# Altium PCB ledstripes.PcbDoc
Units mm, origin at the board's own origin, x right, y up, seen from the top; angles counter-clockwise.
Board outline 38.74 x 35.56 mm, 2 copper layers (Top Layer, Bottom Layer), stack 1.671 mm thick; 33 components, 28 nets, 89 pads, 27 vias.
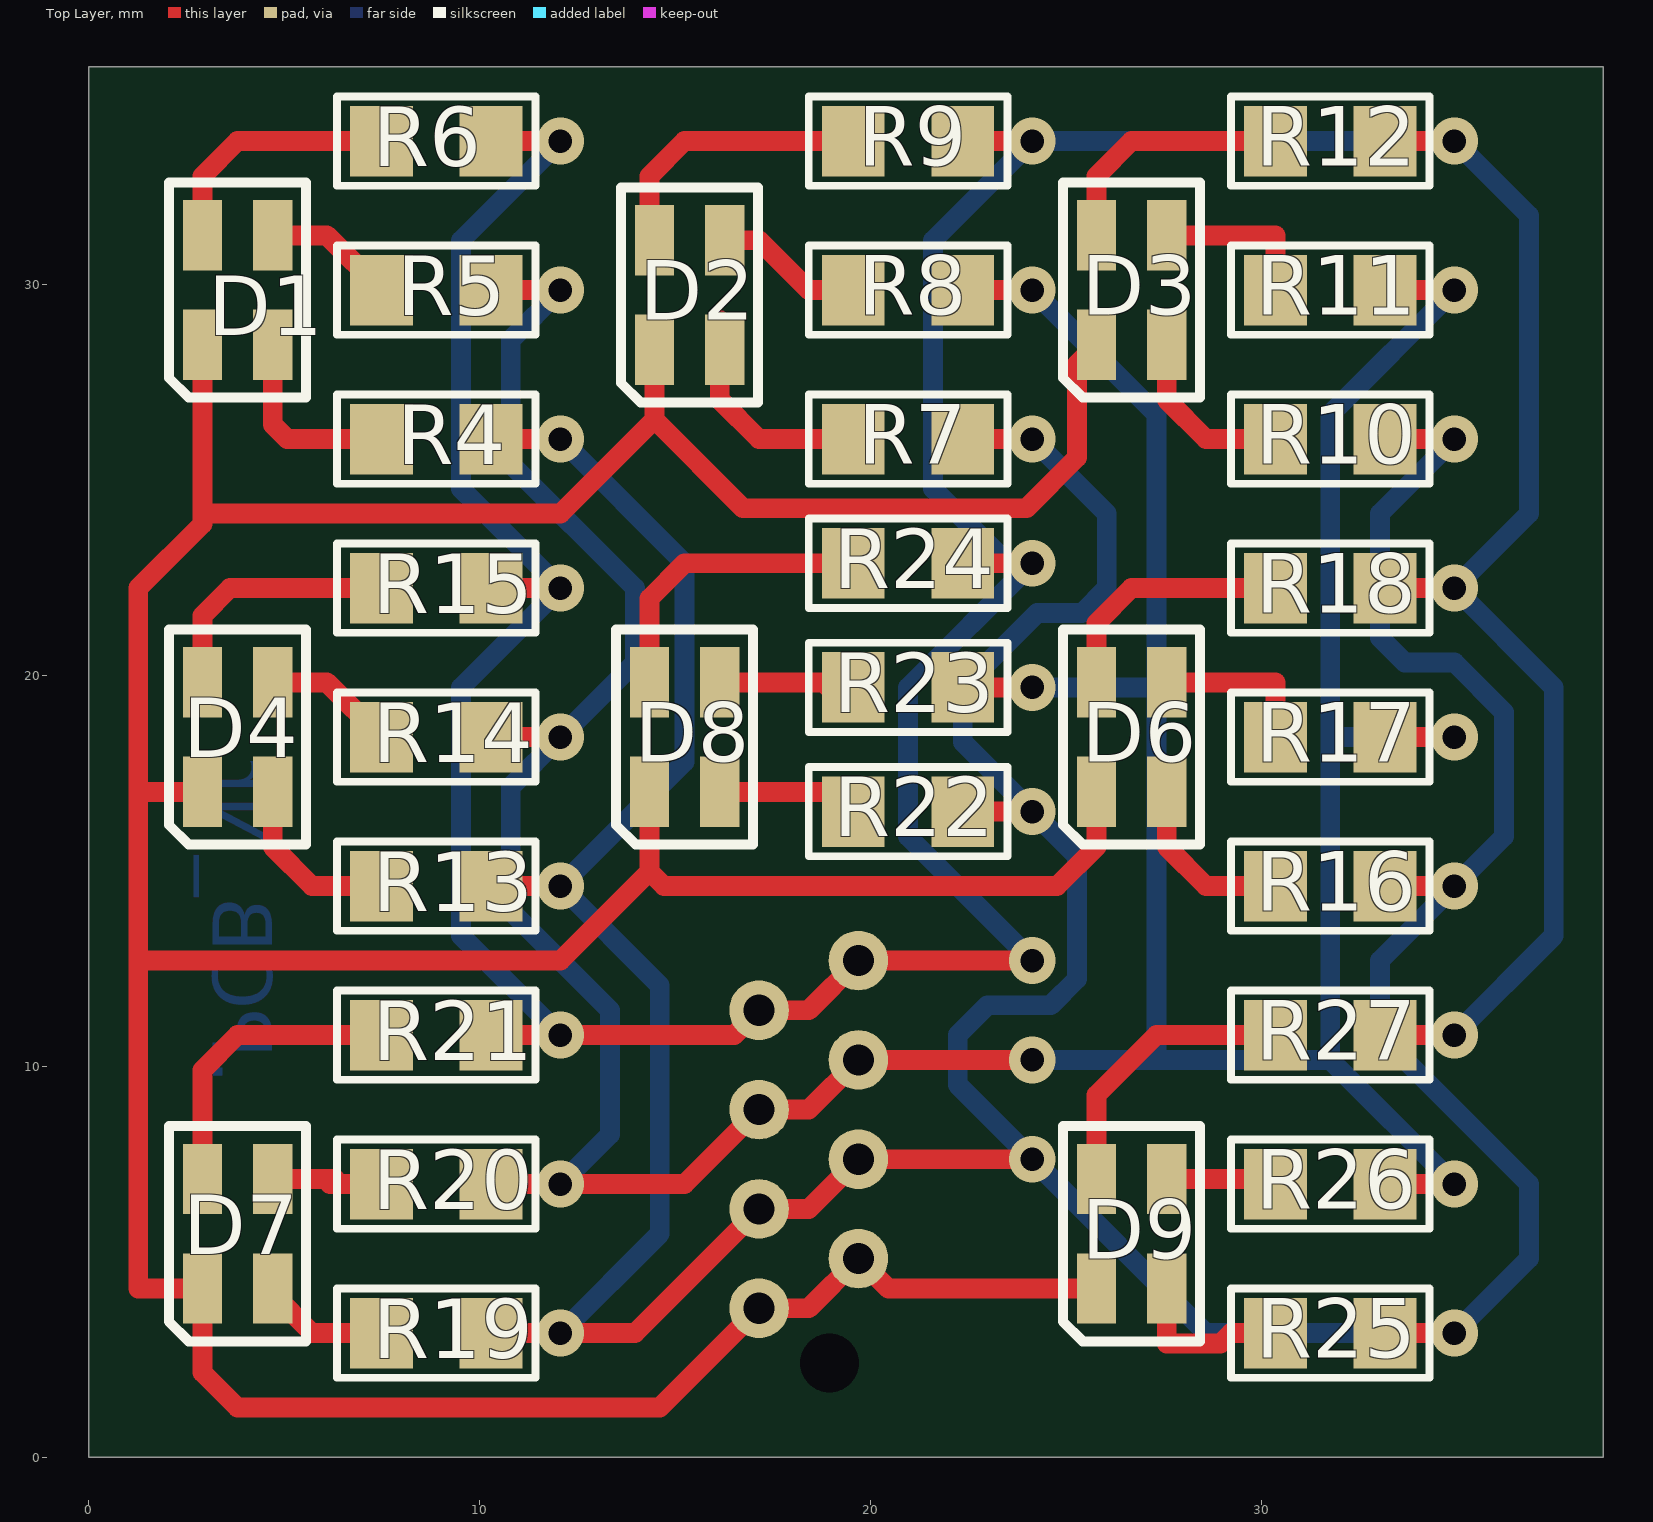
[diagram p0: Top Layer view]
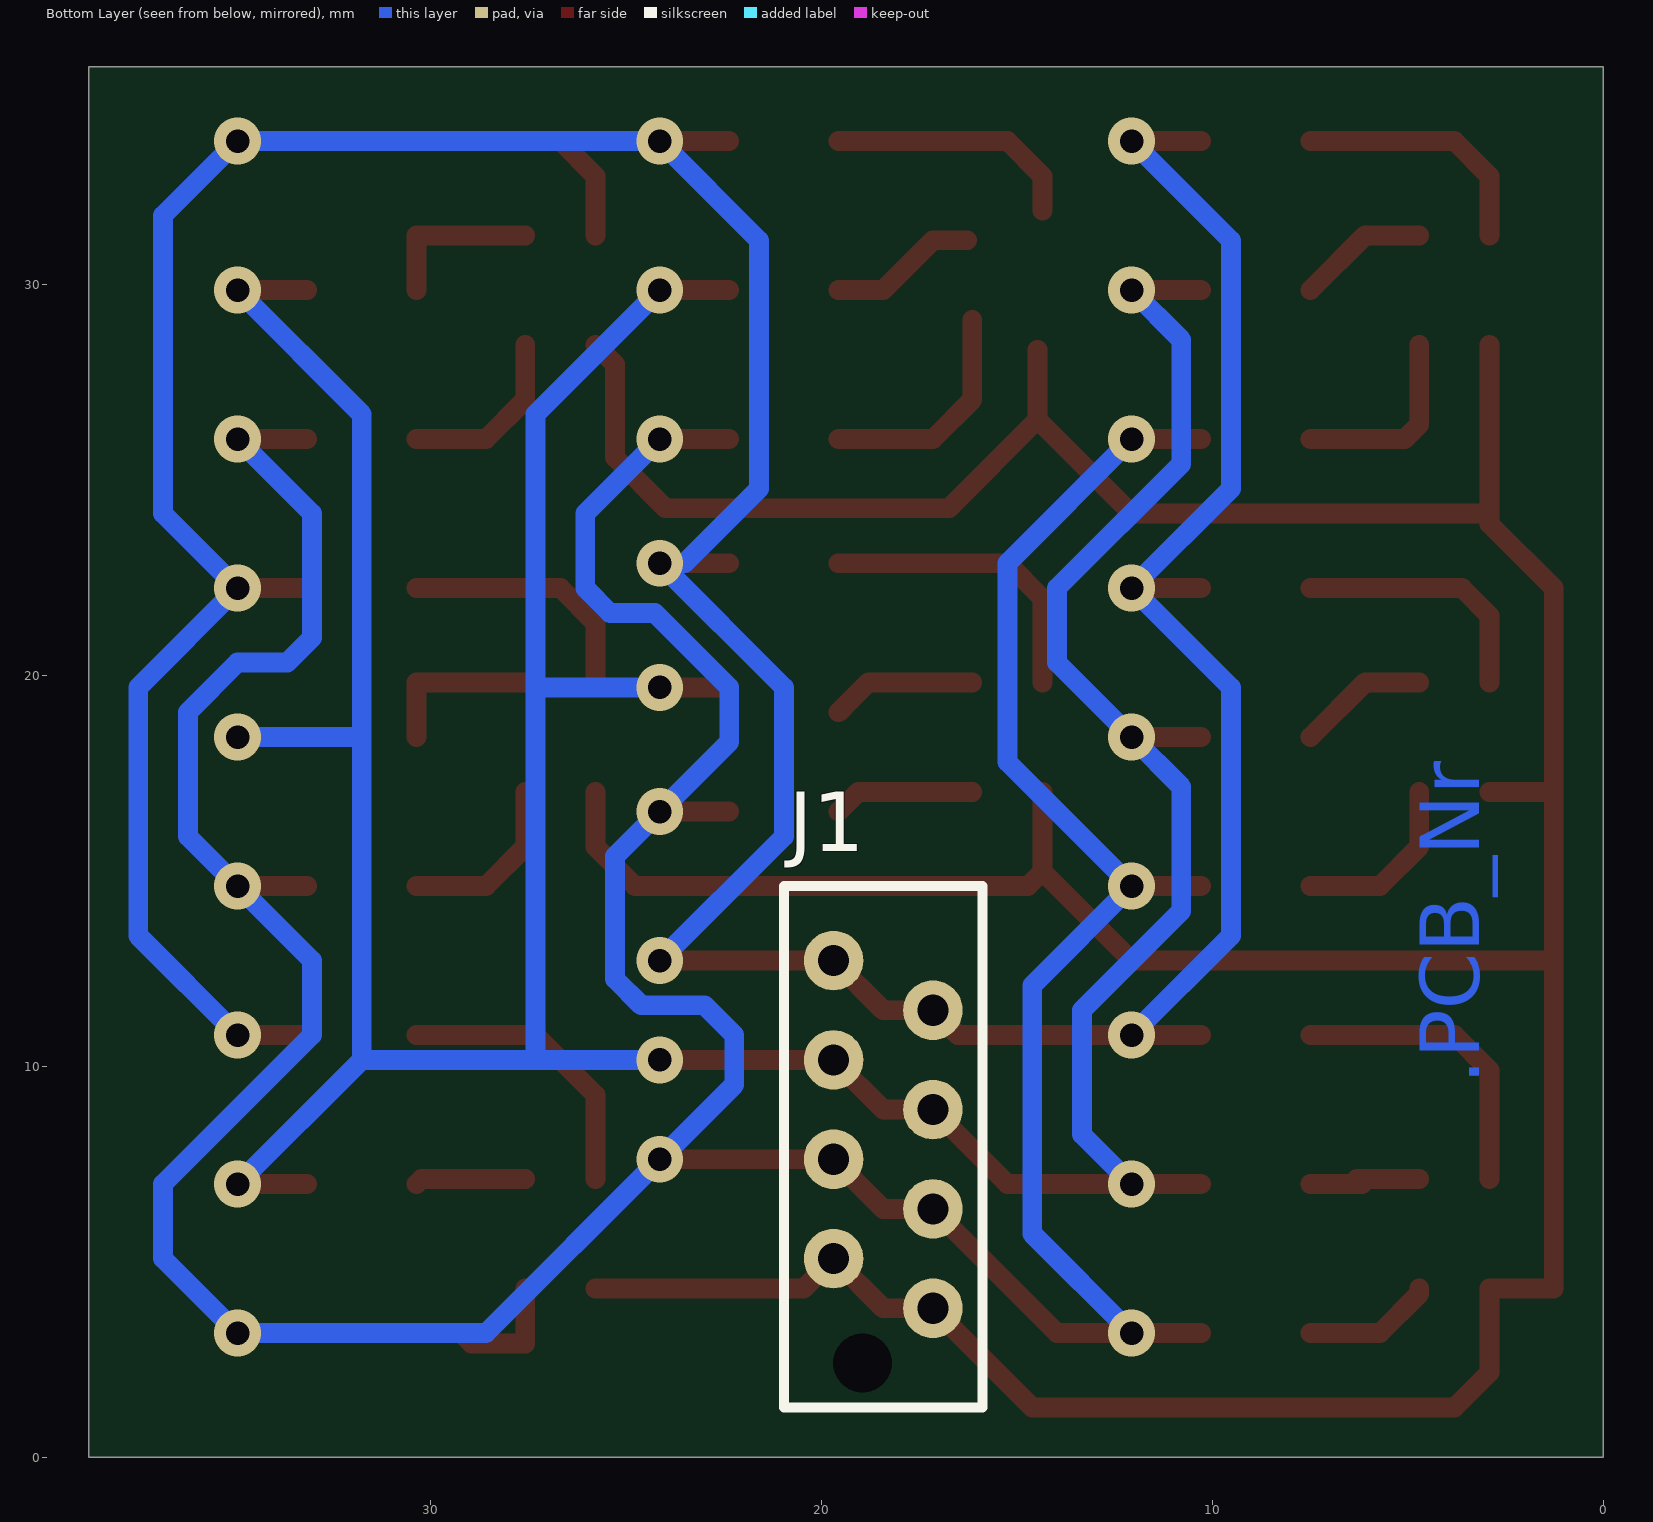
[diagram p1: Bottom Layer view, seen from below]

## Layer stack, top to bottom
Top Layer: signal copper 0.0356
Dielectric: core 1.6, FR-4, Dk 4.8
Bottom Layer: signal copper 0.0356

## Board outline
0,0 0,35.56 38.735,35.56 38.735,0

## Design rules (kind name [scope] priority, off if disabled: settings)
Clearance [All] p1: gap=0.254
HoleSize [All] p1: absolutevalues=TRUE maxlimit=3 minlimit=0.6 maxpercent=80.000 minpercent=20.000
MinimumAnnularRing [All] p1: minimumring=0.254
PolygonConnect [All] p1: connectstyle=Relief reliefconductorwidth=0.254 reliefentries=4 polygonreliefangle="90 Angle"
RoutingVias [All] p1: holewidth=0.711 width=1.27 viastyle="Through Hole" minholewidth=0.711 minwidth=1.27 maxholewidth=0.711 maxwidth=1.27
SilkscreenOverComponentPads [All] p1: minsilkscreentomaskgap=0.254
SolderMaskExpansion [All] p1: expansion=0.102
Width [All] p1: maxlimit=0.508 minlimit=0.254 preferedwidth=0.508
26 further rules are at their usual default settings.

## Components (designator, comment, footprint, x,y, rotation, side; value= is the part's Value field where it differs from the comment)
D1 "NECM325C" D_NECM325C 3.81,29.845 r270 top
D2 "NECM325C" D_NECM325C 15.367,29.718 r270 top
D3 "NECM325C" D_NECM325C 26.67,29.845 r270 top
D4 "NECM325C" D_NECM325C 3.81,18.415 r270 top
D6 "NECM325C" D_NECM325C 26.67,18.415 r270 top
D7 "NECM325C" D_NECM325C 3.81,5.715 r270 top
D8 "NECM325C" D_NECM325C 15.24,18.415 r270 top
D9 "NECM325C" D_NECM325C 26.67,5.715 r270 top
J1 "CNFLC08M_TBD" J_215079-8 17.145,3.81 r270 bottom
R4 "YRES150E" R_1206 8.89,26.035 r180 top
R5 "YRES150E" R_1206 8.89,29.845 r180 top
R6 "YRES68E_TBD" R_1206 8.89,33.655 r180 top
R7 "YRES150E" R_1206 20.955,26.035 r180 top
R8 "YRES150E" R_1206 20.955,29.845 r180 top
R9 "YRES68E_TBD" R_1206 20.955,33.655 r180 top
R10 "YRES150E" R_1206 31.75,26.035 r180 top
R11 "YRES150E" R_1206 31.75,29.845 r180 top
R12 "YRES68E_TBD" R_1206 31.75,33.655 r180 top
R13 "YRES150E" R_1206 8.89,14.605 r180 top
R14 "YRES150E" R_1206 8.89,18.415 r180 top
R15 "YRES68E_TBD" R_1206 8.89,22.225 r180 top
R16 "YRES150E" R_1206 31.75,14.605 r180 top
R17 "YRES150E" R_1206 31.75,18.415 r180 top
R18 "YRES68E_TBD" R_1206 31.75,22.225 r180 top
R19 "YRES150E" R_1206 8.89,3.175 r180 top
R20 "YRES150E" R_1206 8.89,6.985 r180 top
R21 "YRES68E_TBD" R_1206 8.89,10.795 r180 top
R22 "YRES150E" R_1206 20.955,16.51 r180 top
R23 "YRES150E" R_1206 20.955,19.685 r180 top
R24 "YRES68E_TBD" R_1206 20.955,22.86 r180 top
R25 "YRES150E" R_1206 31.75,3.175 r180 top
R26 "YRES150E" R_1206 31.75,6.985 r180 top
R27 "YRES68E_TBD" R_1206 31.75,10.795 r180 top

## Footprints (in the part's own frame and the unit in brackets; to place one, negate y for a bottom-side part, rotate by r counter-clockwise, add the part's x,y. Pads: shape width x height; smd on the part's side, far side on the other; paste and mask are expansions set on the pad)
D_NECM325C [mm] "RGB-LED"
  rect 1.8x1 smd: 1(-1.4,0.9) 2(-1.4,-0.9) 3(1.4,-0.9) 4(1.4,0.9)
  silkscreen extent -2.75,-1.75 2.75,1.75
J_215079-8 [mil] "MicroMatch 8p through hole vertical"
  round 0 hole 59.06 unplated mask+29.53: 0(55.12,-70.87)
  round 60 hole 31.5: 1(0,0) 2(-50,-100) 3(-100,0) 4(-150,-100) 5(-200,0) 6(-250,-100) 7(-300,0) 8(-350,-100)
  silkscreen extent -425,-150 100,50, body extent -413,-148 63,48, height 157
R_1206 [mm] "Chip Resistor; Body 3.2 x 1.6 mm (LxW typ)"
  rect 1.6x1.8 smd: 1(-1.4,0) 2(1.4,0)
  silkscreen extent -2.54,-1.14 2.54,1.14

## Part data
J1: library part CNFLC08F_TBD, "*"
R4 R5 R6 R7 R8 R9 R10 R11 R12 R13 R14 R15 R16 R17 R18 R19 R20 R21 R22 R23 R24 R25 R26 R27: "Resistor"

## Via types
v1: diameter 1.2, hole 0.6, Top Layer to Bottom Layer, 27 vias

## Nets (pads, with @x,y where several pads share a name; then routed paths per layer and width w, separated by ;. In a path a pad name is that pad's centre, name@x,y a point inside that pad or via, vN(x,y) a via of type N, cw(c..) or ccw(c..) an arc to the next point about the centre after c; other vN are vias at no path point)
+5V: D1.3 D2.3 D3.3 D4.3 D6.3 D7.3 D8.3 D9.3 J1.1 J1.2 | length 114.5
  Top Layer w0.508: 1.27,12.7 12.065,12.7 14.34,14.975 ; 1.27,17.015 D4.3 ; D1.3 2.91,24.13 ; D8.3 14.34,14.975 ; D2.3 14.467,26.532 ; D9.3 20.45,4.315 J1.2 18.415,3.81 J1.1 14.605,1.27 3.81,1.27 2.91,2.17 D7.3 1.27,4.315 1.27,22.225 2.91,23.865 2.91,24.13 ; D6.3 25.77,15.61 24.765,14.605 14.71,14.605 14.34,14.975 ; D3.3 25.273,27.948 25.273,25.562 23.979,24.268 16.731,24.268 14.467,26.532 ; 2.91,24.13 12.065,24.13 14.467,26.532
NetD1_1: D1.1 R5.2 | length 3.4
  Top Layer w0.508: D1.1 6.09,31.245 R5.2
NetD1_2: D1.2 R6.2 | length 6.5
  Top Layer w0.508: D1.2 2.91,32.755 3.81,33.655 R6.2
NetD1_4: D1.4 R4.2 | length 5
  Top Layer w0.508: D1.4 4.71,26.405 5.08,26.035 R4.2
NetD2_1: D2.1 R8.2 | length 3.8
  Top Layer w0.508: D2.1 17.142,31.118 18.415,29.845 R8.2
NetD2_2: D2.2 R9.2 | length 6.5
  Top Layer w0.508: D2.2@14.34,31.88 14.34,32.755 15.24,33.655 R9.2
NetD2_4: D2.4 R7.2 | length 5.9
  Top Layer w0.508: D2.4@16.14,29.08 16.14,27.04 17.145,26.035 R7.2
NetD3_1: D3.1 R11.2 | length 4.2
  Top Layer w0.508: D3.1 30.35,31.245 R11.2
NetD3_2: D3.2 R12.2 | length 6.5
  Top Layer w0.508: D3.2 25.77,32.755 26.67,33.655 R12.2
NetD3_4: D3.4 R10.2 | length 4.6
  Top Layer w0.508: D3.4 27.57,27.04 28.575,26.035 R10.2
NetD4_1: D4.1 R14.2 | length 3.4
  Top Layer w0.508: D4.1 6.09,19.815 R14.2
NetD4_2: D4.2 R15.2 | length 6.6
  Top Layer w0.508: D4.2 2.91,21.517 3.618,22.225 R15.2
NetD4_4: D4.4 R13.2 | length 4.6
  Top Layer w0.508: D4.4 4.71,15.61 5.715,14.605 R13.2
NetD6_1: D6.1 R17.2 | length 4.2
  Top Layer w0.508: D6.1 30.35,19.815 R17.2
NetD6_2: D6.2 R18.2 | length 6.5
  Top Layer w0.508: D6.2 25.77,21.325 26.67,22.225 R18.2
NetD6_4: D6.4 R16.2 | length 4.6
  Top Layer w0.508: D6.4 27.57,15.61 28.575,14.605 R16.2
NetD7_1: D7.1 R20.2 | length 3.1
  Top Layer w0.508: D7.1 6.305,7.115 6.175,6.985 R20.2
NetD7_2: D7.2 R21.2 | length 7.7
  Top Layer w0.508: D7.2 2.91,9.895 3.81,10.795 R21.2
NetD7_4: D7.4 R19.2 | length 3.3
  Top Layer w0.508: D7.4 4.71,4.18 5.715,3.175 R19.2
NetD8_1: D8.1 R23.2 | length 3.7
  Top Layer w0.508: D8.1 18.79,19.815 19.238,19.367 R23.2@19.555,19.05
NetD8_2: D8.2 R24.2 | length 7.7
  Top Layer w0.508: D8.2 14.34,21.96 15.24,22.86 R24.2
NetD8_4: D8.4 R22.2 | length 3.6
  Top Layer w0.508: D8.4 19.05,17.015 R22.2
NetD9_1: D9.1 R26.2 | length 2.8
  Top Layer w0.508: D9.1 30.22,7.115 R26.2
NetD9_2: D9.2 R27.2 | length 7.4
  Top Layer w0.508: D9.2 25.77,9.26 27.305,10.795 R27.2
NetD9_4: D9.4 R25.2 | length 4.4
  Top Layer w0.508: D9.4@27.57,4.18 D9.4 27.57,2.91 28.945,2.91 29.21,3.175 R25.2
NetJ1_3: J1.3 J1.4 R4.1 R7.1 R10.1 R13.1 R16.1 R19.1 R22.1 R25.1 | length 123.3
  Top Layer w0.508: R19.1 13.97,3.175 J1.3 18.415,6.35 J1.4 v1(24.13,7.62) ; R13.1 v1(12.065,14.605) ; R4.1 v1(12.065,26.035) ; R22.1 v1(24.13,16.51) ; R7.1 v1(24.13,26.035) ; R25.1 v1(34.925,3.175) ; R16.1 v1(34.925,14.605) ; R10.1 v1(34.925,26.035)
  Bottom Layer w0.508: v1(12.065,3.175) 14.605,5.715 14.605,12.065 v1(12.065,14.605) 15.24,17.78 15.24,22.86 v1(12.065,26.035) ; v1(24.13,26.035) 26.035,24.13 26.035,22.225 25.4,21.59 24.257,21.59 22.352,19.685 22.352,18.288 v1(24.13,16.51) 25.273,15.367 25.273,12.227 24.603,11.557 22.987,11.557 22.225,10.795 22.225,9.525 v1(24.13,7.62) 28.575,3.175 v1(34.925,3.175) 36.83,5.08 36.83,6.985 33.02,10.795 33.02,12.7 v1(34.925,14.605) 36.195,15.875 36.195,19.05 34.925,20.32 33.655,20.32 33.02,20.955 33.02,24.13 v1(34.925,26.035)
NetJ1_5: J1.5 J1.6 R5.1 R8.1 R11.1 R14.1 R17.1 R20.1 R23.1 R26.1 | length 115.6
  Top Layer w0.508: R20.1 15.24,6.985 J1.5 18.415,8.89 J1.6 v1(24.13,10.16) ; R14.1 v1(12.065,18.415) ; R5.1 v1(12.065,29.845) ; R23.1 v1(24.13,19.685) ; R8.1 v1(24.13,29.845) ; R26.1 v1(34.925,6.985) ; R17.1 v1(34.925,18.415) ; R11.1 v1(34.925,29.845)
  Bottom Layer w0.508: v1(12.065,6.985) 13.335,8.255 13.335,11.43 10.795,13.97 10.795,17.145 v1(12.065,18.415) 13.97,20.32 13.97,22.225 10.795,25.4 10.795,28.575 v1(12.065,29.845) ; v1(24.13,10.16) 27.305,10.16 ; v1(24.13,19.685) 27.305,19.685 ; v1(24.13,29.845) 27.305,26.67 27.305,19.685 ; v1(34.925,6.985) 31.75,10.16 ; v1(34.925,18.415) 31.75,18.415 ; v1(34.925,29.845) 31.75,26.67 31.75,18.415 ; 27.305,10.16 31.75,10.16 ; 27.305,10.16 27.305,19.685 ; 31.75,10.16 31.75,18.415
NetJ1_7: J1.7 J1.8 R6.1 R9.1 R12.1 R15.1 R18.1 R21.1 R24.1 R27.1 | length 117.5
  Top Layer w0.508: R21.1 16.51,10.795 J1.7 18.415,11.43 J1.8 v1(24.13,12.7) ; R15.1 v1(12.065,22.225) ; R6.1 v1(12.065,33.655) ; R24.1 v1(24.13,22.86) ; R9.1 v1(24.13,33.655) ; R27.1 v1(34.925,10.795) ; R18.1 v1(34.925,22.225) ; R12.1 v1(34.925,33.655)
  Bottom Layer w0.508: v1(12.065,10.795) 9.525,13.335 9.525,19.685 v1(12.065,22.225) 9.525,24.765 9.525,31.115 v1(12.065,33.655) ; v1(24.13,12.7) 20.955,15.875 20.955,19.685 v1(24.13,22.86) 23.495,22.86 21.59,24.765 21.59,31.115 v1(24.13,33.655) v1(34.925,33.655) 36.83,31.75 36.83,24.13 v1(34.925,22.225) 37.465,19.685 37.465,13.335 v1(34.925,10.795)
pads on no net: J1.0

## Other copper
Bottom Layer:
  text ".PCB_Nr" at 3.175,9.525 h1.52 r270

## Silkscreen, mask and mechanical layers (free items; w line width, h text height)
PcbOutline:
  the board outline again, w0.254
Mechanical 16:
  drawing of 4360 lines, arcs and shapes, not listed
  text "A" at 99.695,65.405 h1.78 r90
  text "D" at -43.815,64.135 h1.78 r270
  text "C" at 3.81,64.135 h1.78 r270
  text "B" at 49.53,64.135 h1.78 r270
  text "2" at -65.405,30.48 h1.78 r90
  text "2" at 122.555,30.48 h1.78 r90
  text "1" at -65.405,-41.91 h1.78 r90
  text "1" at 122.555,-41.91 h1.78 r90
  text "ENGINEER:" at 6.096,-45.542 h1.14
  text "TITLE:" at 44.196,-45.542 h1.14
  text ".ProjectName" at 51.435,-52.146 h2.5
  text "PCB DESIGNER:" at 6.096,-53.035 h1.14
  text ".DrawnByX" at 20.32,-56.083 h2.5
  text "DATE:" at 6.096,-60.782 h1.14
  text "PART NO.:" at 44.196,-60.782 h1.14
  text "REV:" at 97.536,-60.782 h1.14
  text ".PRINT_DATE" at 7.366,-63.83 h1.78
  text ".RevisionNR" at 98.501,-65.227 h2.5
  text "FILE NAME:" at 6.096,-68.402 h1.14
  text "DWG NO:" at 44.196,-68.402 h1.14
  text "SCALE:" at 97.536,-68.402 h1.14
  text ".PCB_FILE_NAME_NO_PATH" at 7.366,-71.45 h1.78
  text ".PCB_Nr" at 52.07,-71.755 h2.5
  text "D" at -46.812,-76.683 h1.78 r270
  text "C" at 1.194,-76.683 h1.78 r270
  text "B" at 49.708,-76.683 h1.78 r270
  text "A" at 99.695,-76.835 h1.78 r90
Drill Drawing:
  text ".Legend" at 41.275,2.54 h1.52
Mechanical 17:
  drawing of 4360 lines, arcs and shapes, not listed
  text "A" at -44.323,65.405 h1.78 r270
  text "B" at 5.842,64.135 h1.78 r90
  text "C" at 51.562,64.135 h1.78 r90
  text "D" at 99.187,64.135 h1.78 r90
  text "2" at -67.183,30.48 h1.78 r270
  text "2" at 120.777,30.48 h1.78 r270
  text "1" at -67.183,-41.91 h1.78 r270
  text "1" at 120.777,-41.91 h1.78 r270
  text "TITLE:" at 11.176,-45.542 h1.14
  text "ENGINEER:" at 49.276,-45.542 h1.14
  text ".ProjectName" at 3.937,-52.146 h2.5
  text "PCB DESIGNER:" at 49.276,-53.035 h1.14
  text "REV:" at -42.164,-60.782 h1.14
  text "PART NO.:" at 11.176,-60.782 h1.14
  text "DATE:" at 49.276,-60.782 h1.14
  text ".PRINT_DATE" at 48.006,-63.83 h1.78
  text ".RevisionNR" at -43.129,-65.227 h2.5
  text "SCALE:" at -42.164,-68.402 h1.14
  text "DWG NO:" at 11.176,-68.402 h1.14
  text "FILE NAME:" at 49.276,-68.402 h1.14
  text ".PCB_FILE_NAME_NO_PATH" at 48.006,-71.45 h1.78
  text ".PCB_Nr" at 3.302,-71.755 h2.5
  text "B" at 5.664,-76.683 h1.78 r90
  text "C" at 54.178,-76.683 h1.78 r90
  text "D" at 102.184,-76.683 h1.78 r90
  text "A" at -44.323,-76.835 h1.78 r270

## Dimensions
0,35.56 to 0,0 on Measures
0,35.56 to 38.735,35.56 on Measures